# Altium PCB SW-SMD_L3.9-W2.9-LS4.8-EH-A_2022-03-15.pcbdoc
Units mm, origin at the board's own origin, x right, y up, seen from the top; angles counter-clockwise.
Board outline 34.66 x 29.51 mm, 2 copper layers (Top Layer, Bottom Layer); 1 components, 0 nets, 4 pads, 0 vias.
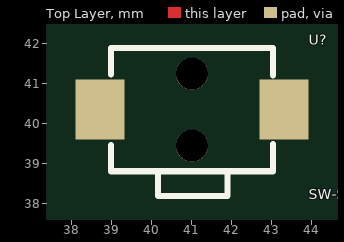
[diagram p0: Top Layer view]
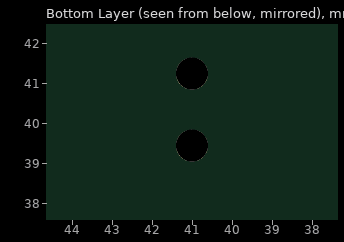
[diagram p1: Bottom Layer view, seen from below]

## Layer stack, top to bottom
Top Layer: signal copper (thickness not stored)
Dielectric: dielectric 0.32, FR-4, Dk 4.8
Bottom Layer: signal copper (thickness not stored)

## Board outline
60.059,25.4 25.4,25.4 25.4,54.906 60.059,54.906

## Components (designator, comment, footprint, x,y, rotation, side; value= is the part's Value field where it differs from the comment)
U? "SW-SMD_L3.9-W2.9-LS4.8-EH-A" SW-SMD_L3.9-W2.9-LS4.8-EH-A 41.015,40.026 r0 top

## Footprints (in the part's own frame and the unit in brackets; to place one, negate y for a bottom-side part, rotate by r counter-clockwise, add the part's x,y. Pads: shape width x height; smd on the part's side, far side on the other; paste and mask are expansions set on the pad)
SW-SMD_L3.9-W2.9-LS4.8-EH-A [mm]
  rect 1.23x1.5 smd: 1(-2.3,0.309) 2(2.3,0.309)
  round 0.8 hole 0.8 unplated: ""(0,-0.591) ""(0,1.209)
  silkscreen extent -2.03,-1.85 2.03,1.85

## Nets (pads, with @x,y where several pads share a name; then routed paths per layer and width w, separated by ;. In a path a pad name is that pad's centre, name@x,y a point inside that pad or via, vN(x,y) a via of type N, cw(c..) or ccw(c..) an arc to the next point about the centre after c; other vN are vias at no path point)
pads on no net: U?. U?.1 U?.2